# EAGLE board GuitarTuner (EAGLE 9.6.2)
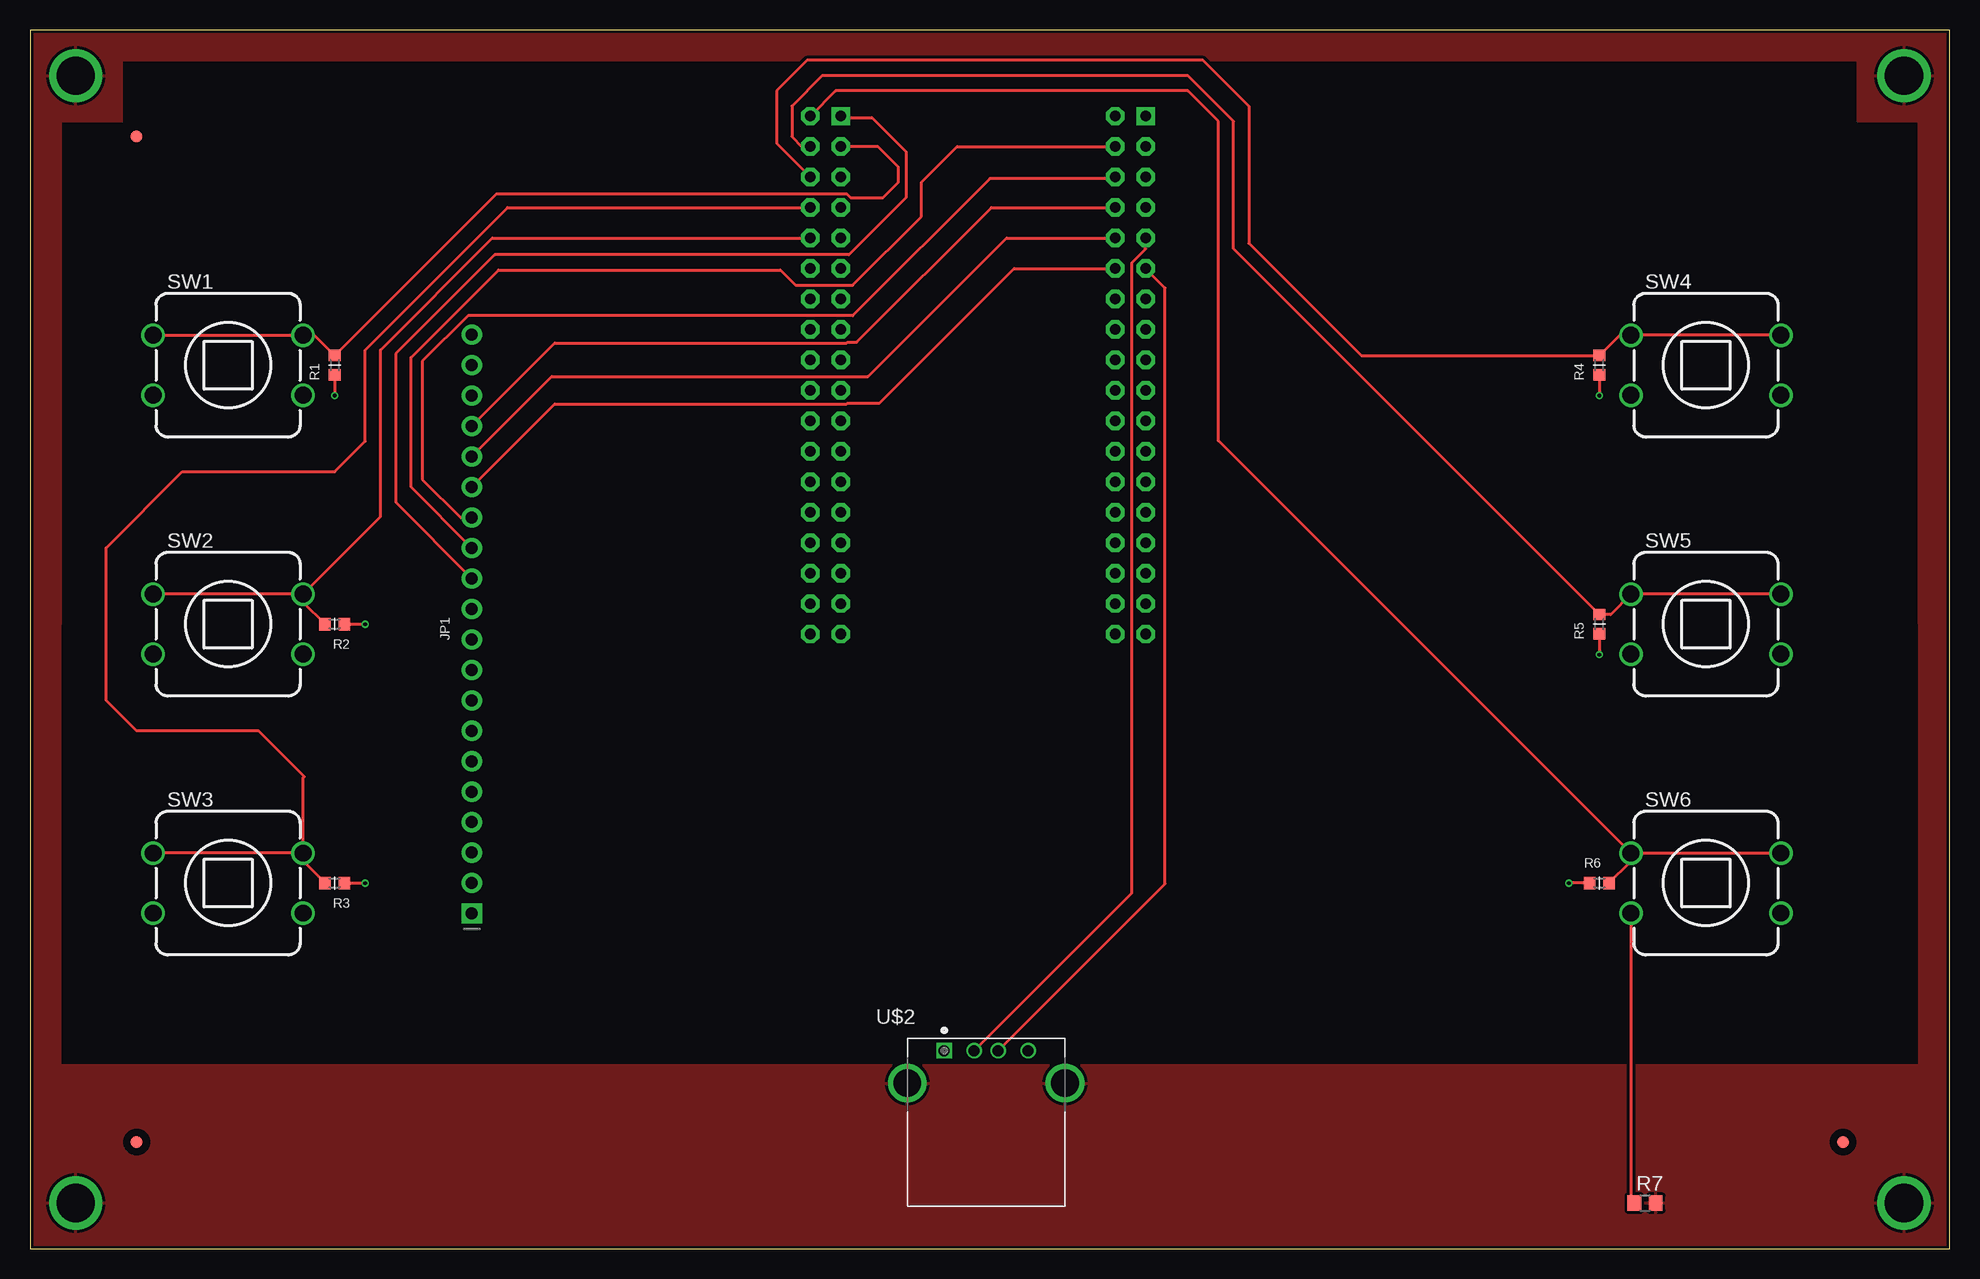
[diagram p0: board, top side]
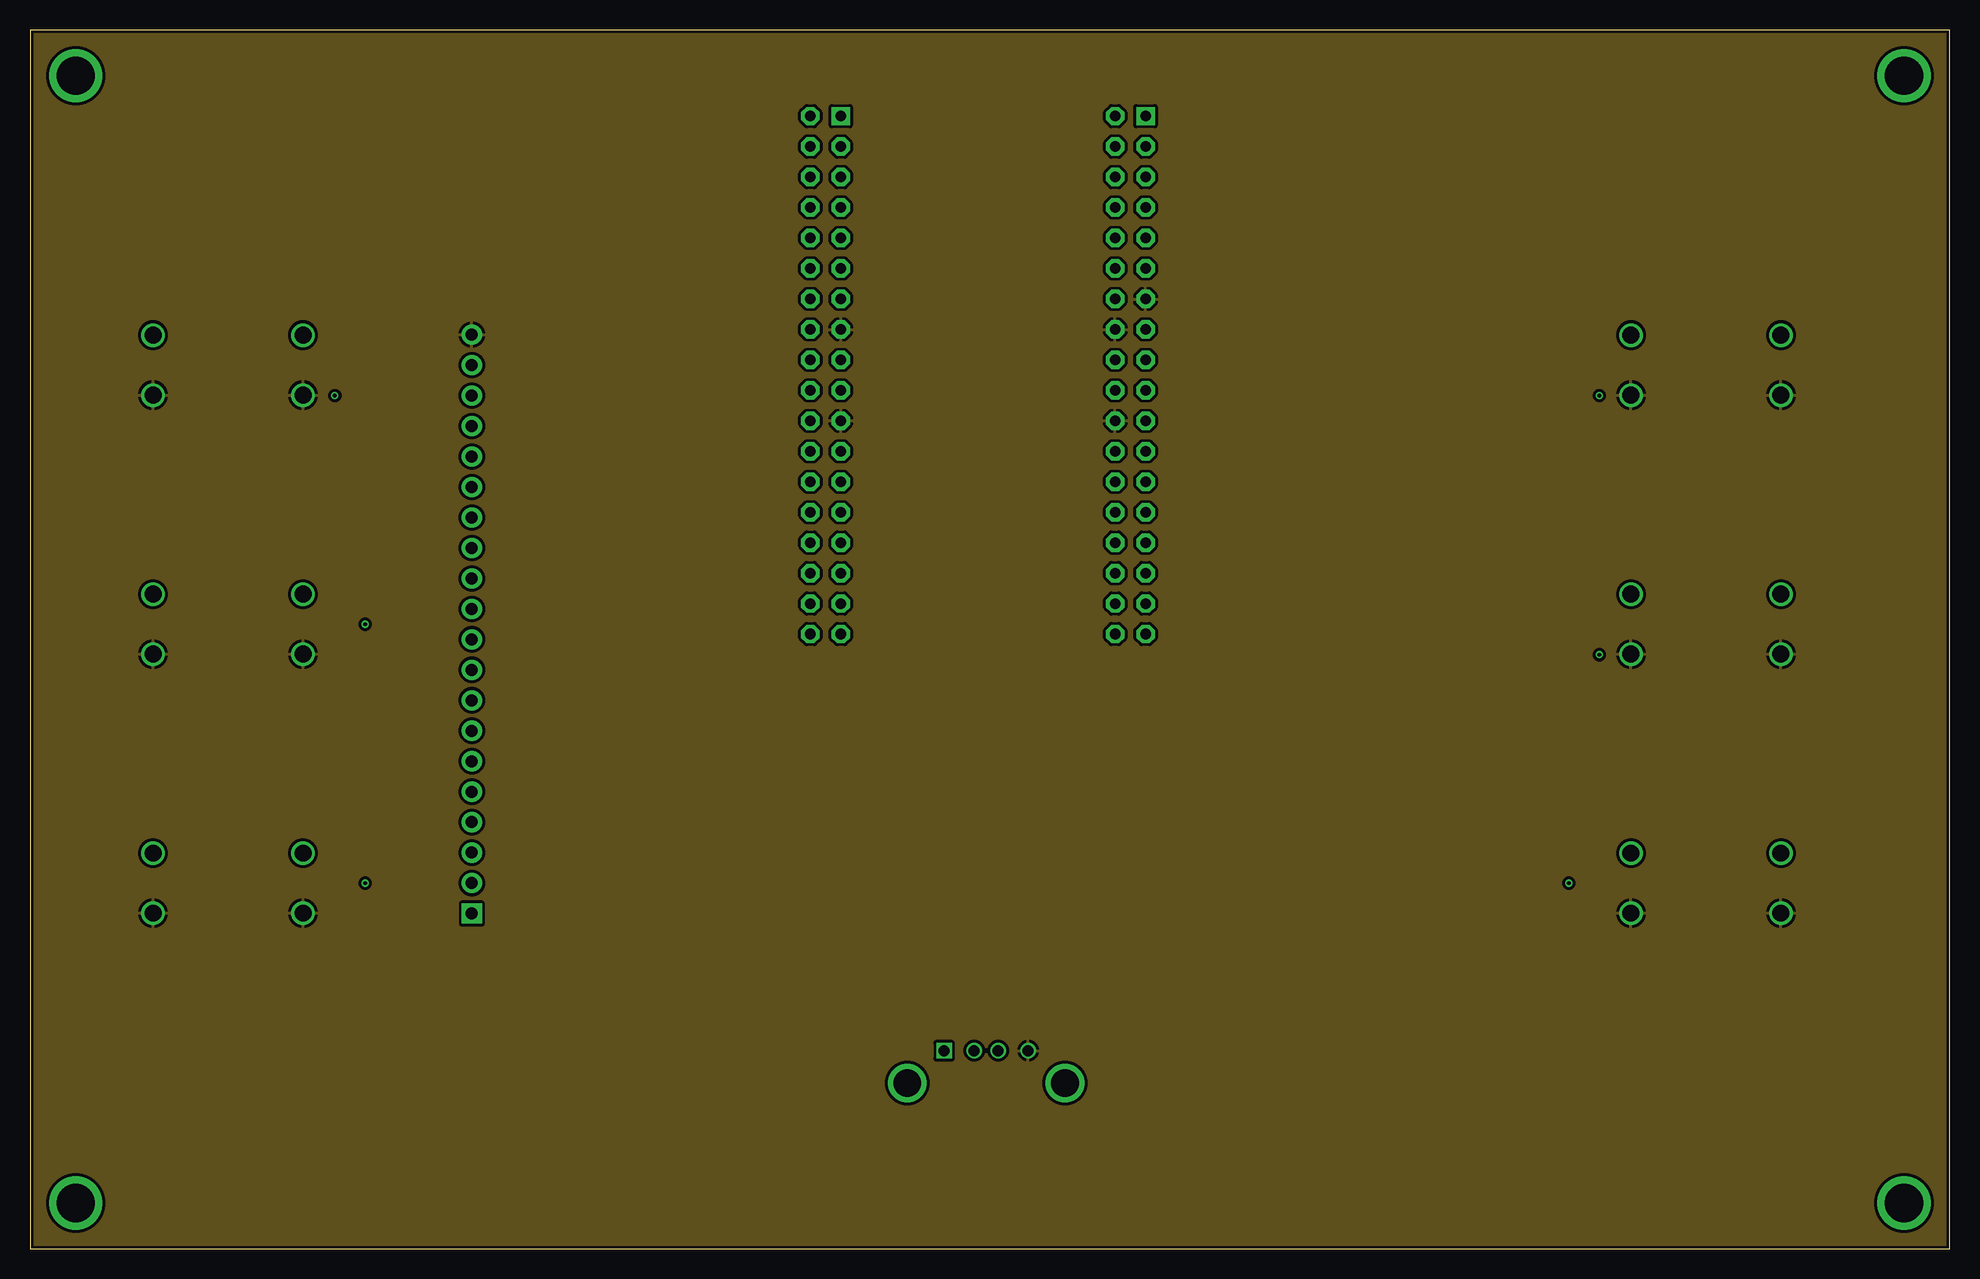
[diagram p1: board, inner layer Route2]
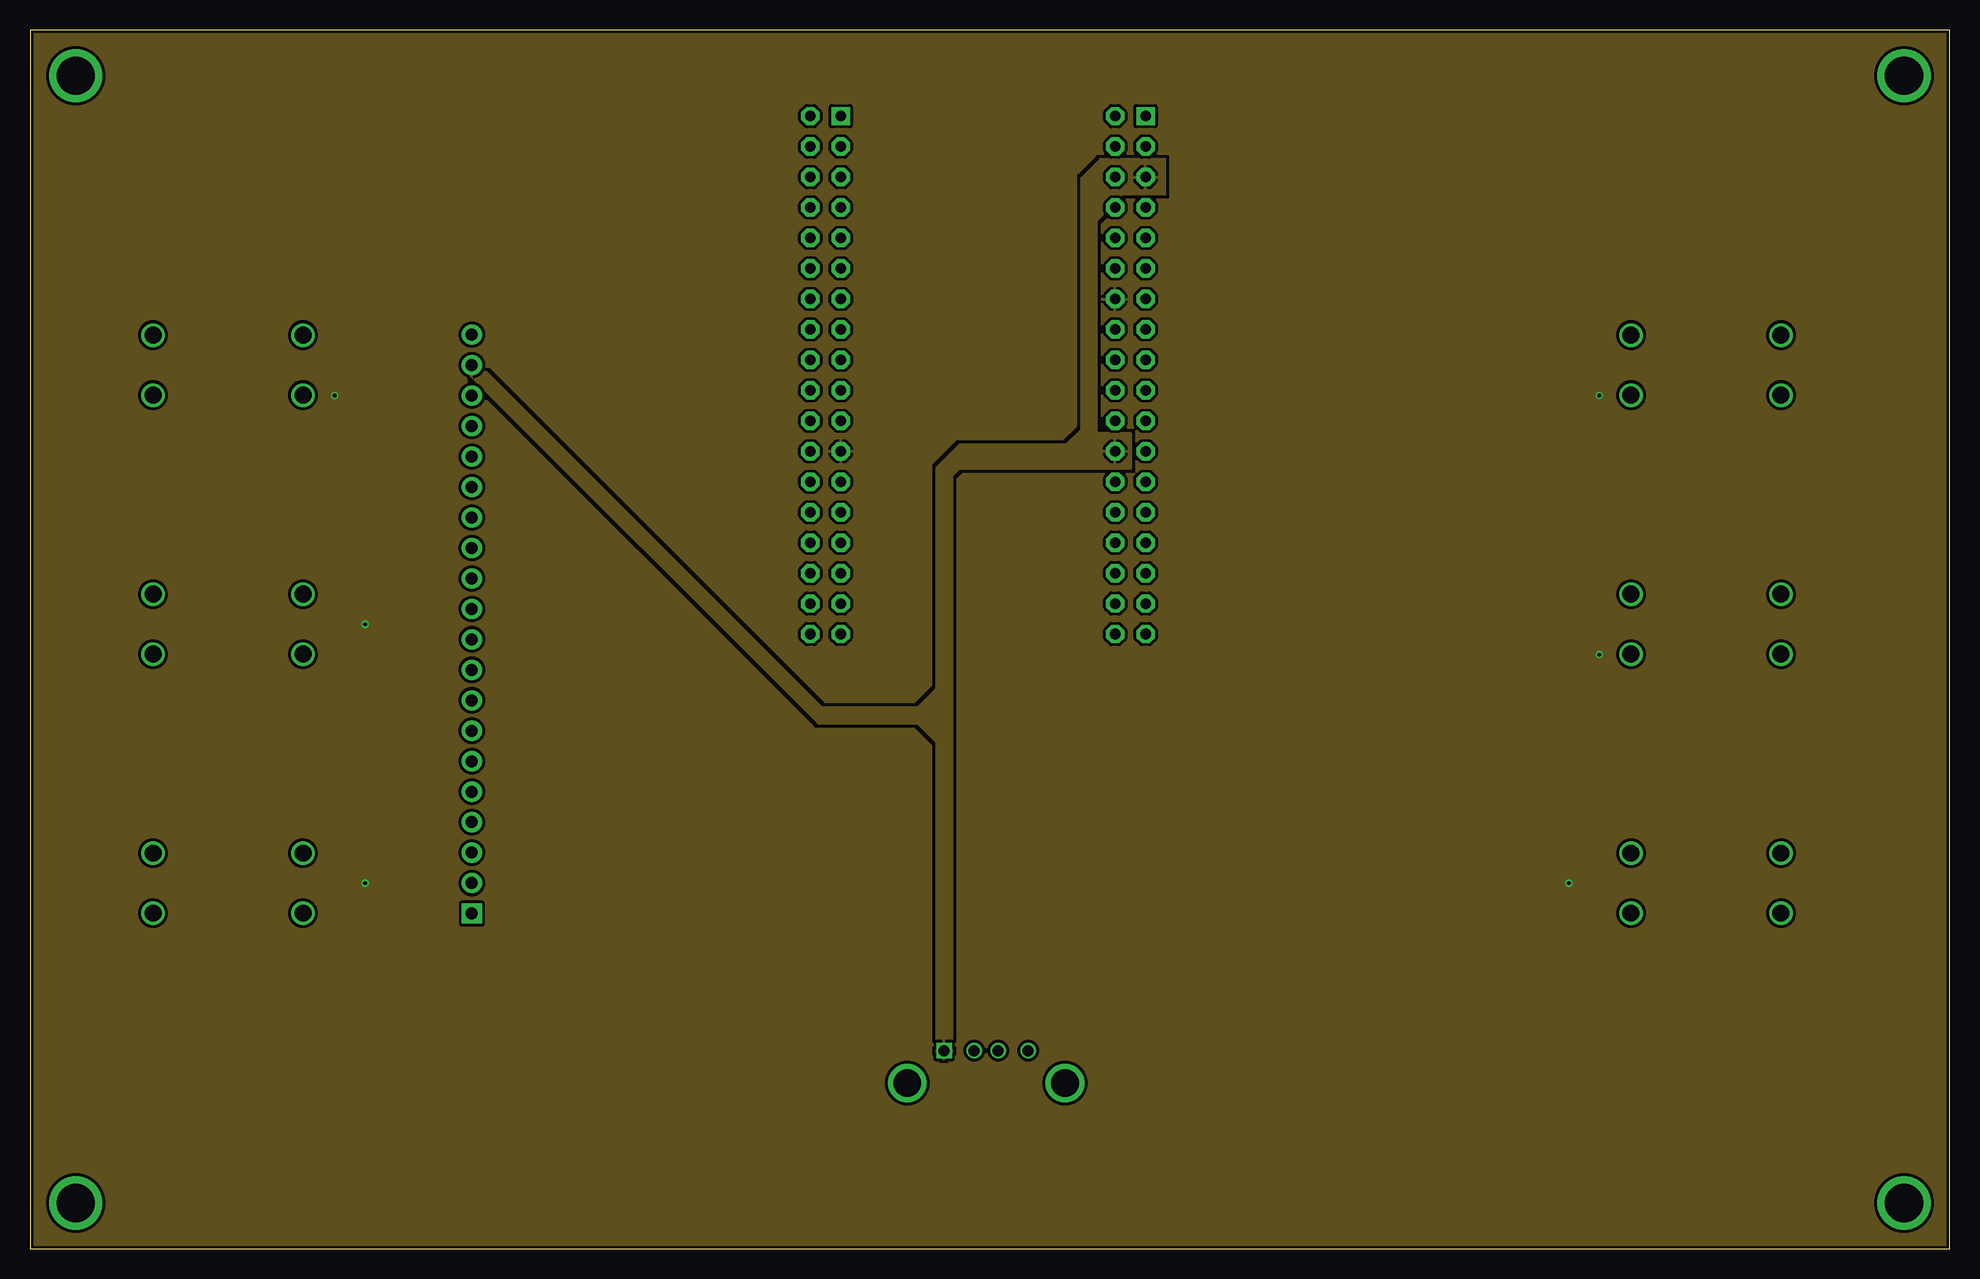
[diagram p2: board, inner layer Route15]
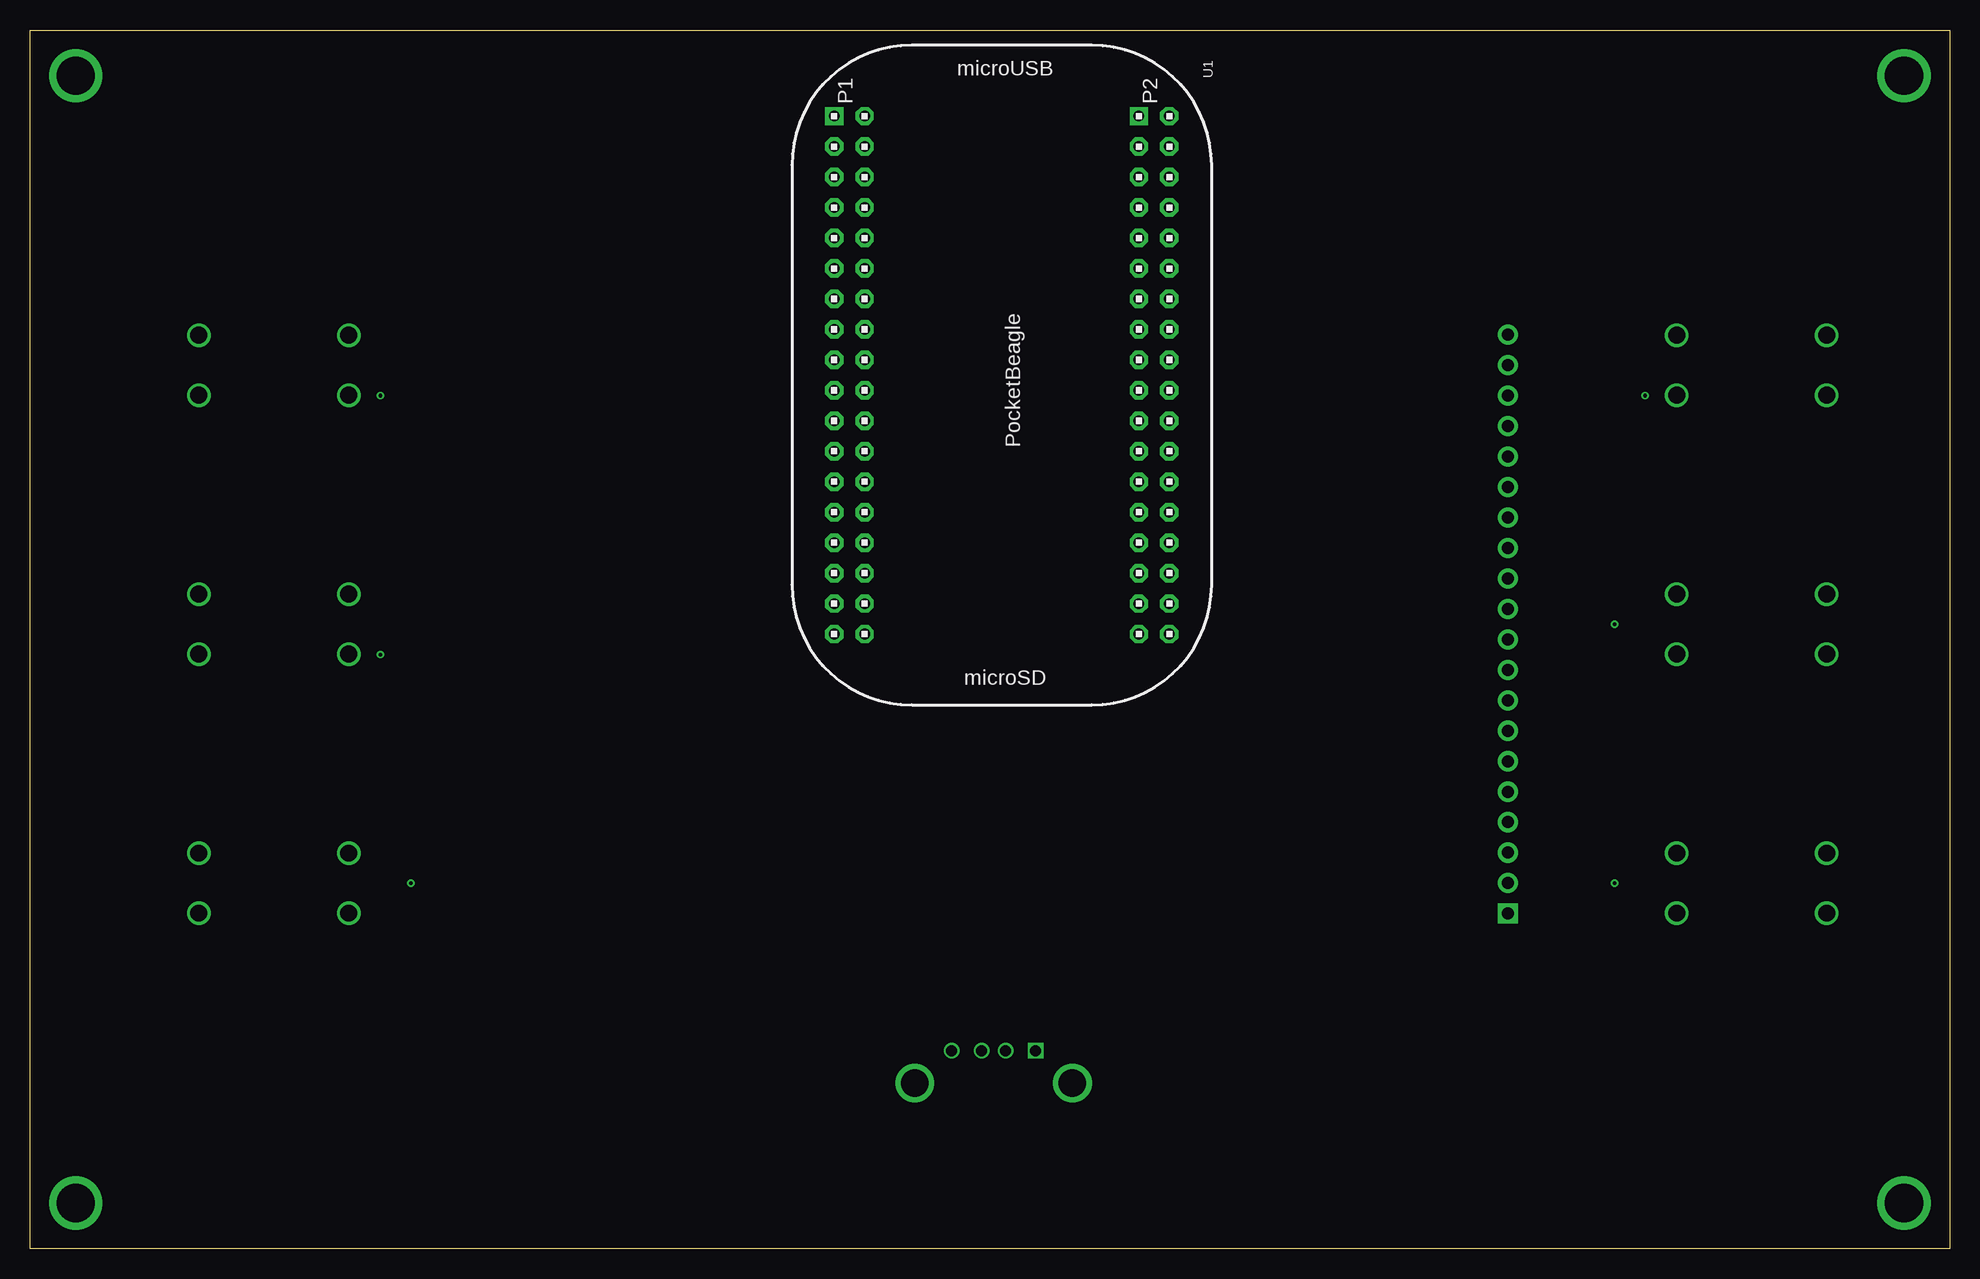
[diagram p3: board, bottom side, seen from below]

Size 160.02 x 101.6 mm. Coordinates in mm from the lower left corner, seen from the top.
Outline: 0,0 160,0 160.02,101.6 0,101.6 0,0
Copper layers (1*2*15*16): Top 0.035mm / dielectric 0.23mm / Route2 0.035mm / dielectric 0.93mm / Route15 0.035mm / dielectric 0.23mm / Bottom 0.035mm
Design rules "ENGI301_4lyr": minimum track width 10mil, minimum drill 12mil, track to track 10mil, track to pad 10mil, pad to pad 10mil, via to via 10mil, smd to smd 10mil, copper to edge 10mil, drill to drill 12mil, minimum pad ring 6mil, minimum via ring 6mil, stop-mask expansion 3mil, vias tented up to drill 25mil, thermal gap 10mil

## Footprints (pad centres in the part's own frame; a part is rotated, then mirrored left to right if it is on the bottom)
FIDUCIAL_40MIL = smd 1.016 x 1.016: P$1 0,0
1X20_ROUND = drill 1 pad 1.676 square: 1 -24.13,0 | drill 1 pad 1.676: 2 -21.59,0; 3 -19.05,0; 4 -16.51,0; 5 -13.97,0; 6 -11.43,0; 7 -8.89,0; 8 -6.35,0; 9 -3.81,0; 10 -1.27,0; 11 1.27,0; 12 3.81,0; 13 6.35,0; 14 8.89,0; 15 11.43,0; 16 13.97,0; 17 16.51,0; 18 19.05,0; 19 21.59,0; 20 24.13,0
MOUNTING_HOLE = drill 3.175 pad 4.445: P$1 0,0
R0603 = smd 0.95 x 1.031: 1 -0.8,0; 2 0.8,0
R0805 = smd 1.143 x 1.27: 1 -0.889,0; 2 0.889,0
BUTTON_12.5MM = drill 1.4: 1 -6.25,2.5; 2 -6.25,-2.5; 3 6.25,2.5; 4 6.25,-2.5
POCKETBEAGLE = drill 0.889 pad 1.524 square: 1@P1 5.91,3.53; 1@P2 5.91,28.93 | drill 0.889 pad 1.524 octagon: 2@P1 5.91,6.07; 2@P2 5.91,31.47; 3@P1 8.45,3.53; 3@P2 8.45,28.93; 4@P1 8.45,6.07; 4@P2 8.45,31.47; 5@P1 10.99,3.53; 5@P2 10.99,28.93; 6@P1 10.99,6.07; 6@P2 10.99,31.47; 7@P1 13.53,3.53; 7@P2 13.53,28.93; 8@P1 13.53,6.07; 8@P2 13.53,31.47; 9@P1 16.07,3.53; 9@P2 16.07,28.93; 10@P1 16.07,6.07; 10@P2 16.07,31.47; 11@P1 18.61,3.53; 11@P2 18.61,28.93; 12@P1 18.61,6.07; 12@P2 18.61,31.47; 13@P1 21.15,3.53; 13@P2 21.15,28.93; 14@P1 21.15,6.07; 14@P2 21.15,31.47; 15@P1 23.69,3.53; 15@P2 23.69,28.93; 16@P1 23.69,6.07; 16@P2 23.69,31.47; 17@P1 26.23,3.53; 17@P2 26.23,28.93; 18@P1 26.23,6.07; 18@P2 26.23,31.47; 19@P1 28.77,3.53; 19@P2 28.77,28.93; 20@P1 28.77,6.07; 20@P2 28.77,31.47; 21@P1 31.31,3.53; 21@P2 31.31,28.93; 22@P1 31.31,6.07; 22@P2 31.31,31.47; 23@P1 33.85,3.53; 23@P2 33.85,28.93; 24@P1 33.85,6.07; 24@P2 33.85,31.47; 25@P1 36.39,3.53; 25@P2 36.39,28.93; 26@P1 36.39,6.07; 26@P2 36.39,31.47; 27@P1 38.93,3.53; 27@P2 38.93,28.93; 28@P1 38.93,6.07; 28@P2 38.93,31.47; 29@P1 41.47,3.53; 29@P2 41.47,28.93; 30@P1 41.47,6.07; 30@P2 41.47,31.47; 31@P1 44.01,3.53; 31@P2 44.01,28.93; 32@P1 44.01,6.07; 32@P2 44.01,31.47; 33@P1 46.55,3.53; 33@P2 46.55,28.93; 34@P1 46.55,6.07; 34@P2 46.55,31.47; 35@P1 49.09,3.53; 35@P2 49.09,28.93; 36@P1 49.09,6.07; 36@P2 49.09,31.47
USB_PORT = drill 0.92 square: 1 0,0 | drill 0.92: 2 2.5,0; 3 4.5,0; 4 7,0 | drill 2.3: SH1 -3.07,-2.71; SH2 10.07,-2.71

## Placement (x,y rotation side)
FUD1  FIDUCIAL  [FIDUCIAL_40MIL]  8.89,8.89 0 top
FUD2  FIDUCIAL  [FIDUCIAL_40MIL]  151.13,8.89 0 top
FUD3  FIDUCIAL  [FIDUCIAL_40MIL]  8.89,92.71 0 top
JP1  LCD_SCREEN  [1X20_ROUND]  36.83,52.07 90 top
MGT1  MOUNTING_HOLE  [MOUNTING_HOLE]  3.81,3.81 0 top
MGT2  MOUNTING_HOLE  [MOUNTING_HOLE]  3.81,97.79 0 top
MGT3  MOUNTING_HOLE  [MOUNTING_HOLE]  156.21,97.79 0 top
MGT4  MOUNTING_HOLE  [MOUNTING_HOLE]  156.21,3.81 0 top
R1  1k  [R0603]  25.4,73.66 90 top
R2  1k  [R0603]  25.4,52.07 180 top
R3  1k  [R0603]  25.4,30.48 180 top
R4  1k  [R0603]  130.81,73.66 90 top
R5  1k  [R0603]  130.81,52.07 90 top
R6  1k  [R0603]  130.81,30.48 0 top
R7  1k  [R0805]  134.62,3.81 0 top
SW1  PUSH_BUTTON  [BUTTON_12.5MM]  16.51,73.66 0 top
SW2  PUSH_BUTTON  [BUTTON_12.5MM]  16.51,52.07 0 top
SW3  PUSH_BUTTON  [BUTTON_12.5MM]  16.51,30.48 0 top
SW4  PUSH_BUTTON  [BUTTON_12.5MM]  139.7,73.66 0 top
SW5  PUSH_BUTTON  [BUTTON_12.5MM]  139.7,52.07 0 top
SW6  PUSH_BUTTON  [BUTTON_12.5MM]  139.7,30.48 0 top
U1  POCKETBEAGLE  [POCKETBEAGLE]  96.52,100.33 270 bottom
U$2  USB_PORT  [USB_PORT]  76.2,16.51 0 top

## Library data of the parts
FUD1-FUD3 JP1 MGT1-MGT4 R1-R7 SW1-SW6 U1 U$2 = GuitarTuner

## Nets
BAT.VIN: U1.14@P2
BUTTON_1: R1.2 SW1.1 SW1.3 U1.3@P2
BUTTON_2: R2.2 SW2.1 SW2.3 U1.10@P2
BUTTON_3: R3.2 SW3.1 SW3.3 U1.8@P2
BUTTON_4: R4.2 SW4.1 SW4.3 U1.6@P2
BUTTON_5: R5.2 SW5.1 SW5.3 U1.4@P2
BUTTON_6: R6.2 SW6.1 SW6.3 U1.2@P2
CGND: MGT1.P$1 MGT2.P$1 MGT3.P$1 MGT4.P$1 R7.2 U$2.SH1 U$2.SH2
CLK: JP1.17 U1.8@P1
CS: JP1.14 U1.6@P1
D/C: JP1.13 U1.4@P1
GND: JP1.20 R7.1 SW1.2 SW1.4 SW2.2 SW2.4 SW3.2 SW3.4 SW4.2 SW4.4 SW5.2 SW5.4 SW6.2 SW6.4 U1.13@P1 U1.15@P2 U1.16@P1 U1.21@P2 U1.22@P1 U$2.4
MISO: JP1.16 U1.10@P1
MOSI: JP1.15 U1.12@P1
RST: JP1.12 U1.1@P2
USB_D+: U1.11@P1 U$2.3
USB_D-: U1.9@P1 U$2.2
VDD_3P3V: R1.1 R2.1 R3.1 R4.1 R5.1 R6.1 U1.14@P1 U1.23@P2
VDD_5V: JP1.19 U1.5@P1 U1.24@P1 U$2.1
VIN: U1.2@P1
VOUT: U1.13@P2

## Tracks (layer width: path | path; a pad name or v marks a point on that pad's centre or on a via)
BUTTON_1
  Top 0.254: U1.3@P2 70.68,91.88 72.39,90.17 72.39,88.9 71.12,87.63 68.38,87.63 68.06,87.94 38.88,87.94 R1.2 23.7,76.16 22.86,76.16 SW1.3 SW1.1
BUTTON_2
  Top 0.254: 22.83,54.64 SW2.3 SW2.1 | 22.83,54.64 29.21,61.02 29.21,74.93 38.54,84.26 U1.10@P2 | R2.2 22.83,53.84 22.83,54.64
BUTTON_3
  Top 0.254: SW3.3 22.76,39.27 22.86,39.37 19.05,43.18 8.89,43.18 6.35,45.72 6.35,58.42 12.7,64.77 25.4,64.77 27.94,67.31 27.94,74.93 39.81,86.8 U1.8@P2 | R3.2 22.76,32.32 SW3.3 | SW3.3 SW3.1
BUTTON_4
  Top 0.254: U1.6@P2 62.23,92.16 62.23,96.52 64.77,99.06 97.79,99.06 101.6,95.25 101.6,83.82 110.96,74.46 R4.2 132.51,76.16 SW4.1 SW4.3
BUTTON_5
  Top 0.254: U1.4@P2 64.33,91.88 63.5,92.71 63.5,95.25 66.04,97.79 96.52,97.79 100.33,93.98 100.33,83.35 R5.2 131.75,52.87 SW5.1 SW5.3
BUTTON_6
  Top 0.254: 133.38,33.05 SW6.1 SW6.3 | 133.38,33.05 99.06,67.37 99.06,93.98 96.52,96.52 67.15,96.52 U1.2@P2 | R6.2 133.38,32.25 133.38,33.05
CGND
  pour Top: -1.27,52.07 -1.27,102.87 161.29,102.87 161.29,52.07 157.48,52.07 157.48,93.98 152.4,93.98 152.4,99.06 7.62,99.06 7.62,93.98 2.54,93.98 2.54,52.07
  pour Top: -1.27,52.07 -1.27,-1.27 161.29,-1.27 161.29,52.07 157.48,52.07 157.48,15.24 2.54,15.24 2.54,52.07
CLK
  Top 0.254: JP1.17 43.75,75.5 68.06,75.5 68.13,75.56 68.9,75.56 80.13,86.8 U1.8@P1
CS
  Top 0.254: U1.6@P1 90.33,89.22 80.01,89.22 68.58,77.79 36.51,77.79 32.7,73.98 32.7,64.14 35.88,60.96 JP1.14
D/C
  Top 0.254: JP1.13 31.75,63.5 31.75,74.3 39.05,81.6 62.55,81.6 63.82,80.33 68.58,80.33 74.3,86.04 74.3,87 74.3,87.31 74.3,88.9 77.28,91.88 U1.4@P1
GND
  Top 0.254: SW6.2 133.45,4.09 R7.1
  pour Route2: -2.54,104.14 -2.54,-2.54 162.56,-2.54 162.56,104.14
MISO
  Top 0.254: JP1.16 43.5,72.71 69.85,72.71 81.4,84.26 U1.10@P1
MOSI
  Top 0.254: JP1.15 43.75,70.42 68.06,70.42 68.13,70.48 70.8,70.48 82.04,81.72 U1.12@P1
RST
  Top 0.254: U1.1@P2 67.71,94.3 70.17,94.3 73.03,91.44 73.03,87.63 68.26,82.87 38.73,82.87 30.48,74.61 30.48,62.23 JP1.12
USB_D+
  Top 0.254: U$2.3 94.61,30.43 94.61,80.09 U1.11@P1
USB_D-
  Top 0.254: U1.9@P1 92.99,83.34 91.85,82.19 91.85,29.66 U$2.2
VDD_3P3V  (via drill 0.3 pad 0.61)
  Top 0.254: R1.1 v25.4,71.12 | R2.1 v27.94,52.07 | R3.1 v27.94,30.48 | R6.1 v128.27,30.48 | R5.1 v130.81,49.53 | R4.1 v130.81,71.12
  pour Route15 (rank 6): -5.08,106.68 -5.08,-5.08 165.1,-5.08 165.1,106.68
VDD_5V
  pour Route15: 75.56,15.88 76.83,15.88 76.83,64.45 77.47,65.09 91.76,65.09 91.76,67.94 88.9,67.94 88.9,85.72 91.12,87.95 94.61,87.95 94.61,90.81 89.22,90.81 87.63,89.22 87.63,68.26 86.36,66.99 77.46,66.98 75.56,65.09 75.56,46.67 73.98,45.09 66.04,45.09 36.83,74.3 36.2,74.3 36.2,73.34 65.72,43.81 73.98,43.81 75.56,42.23